# EAGLE board rev1-dragonfly_panelize (EAGLE 8.2.2)
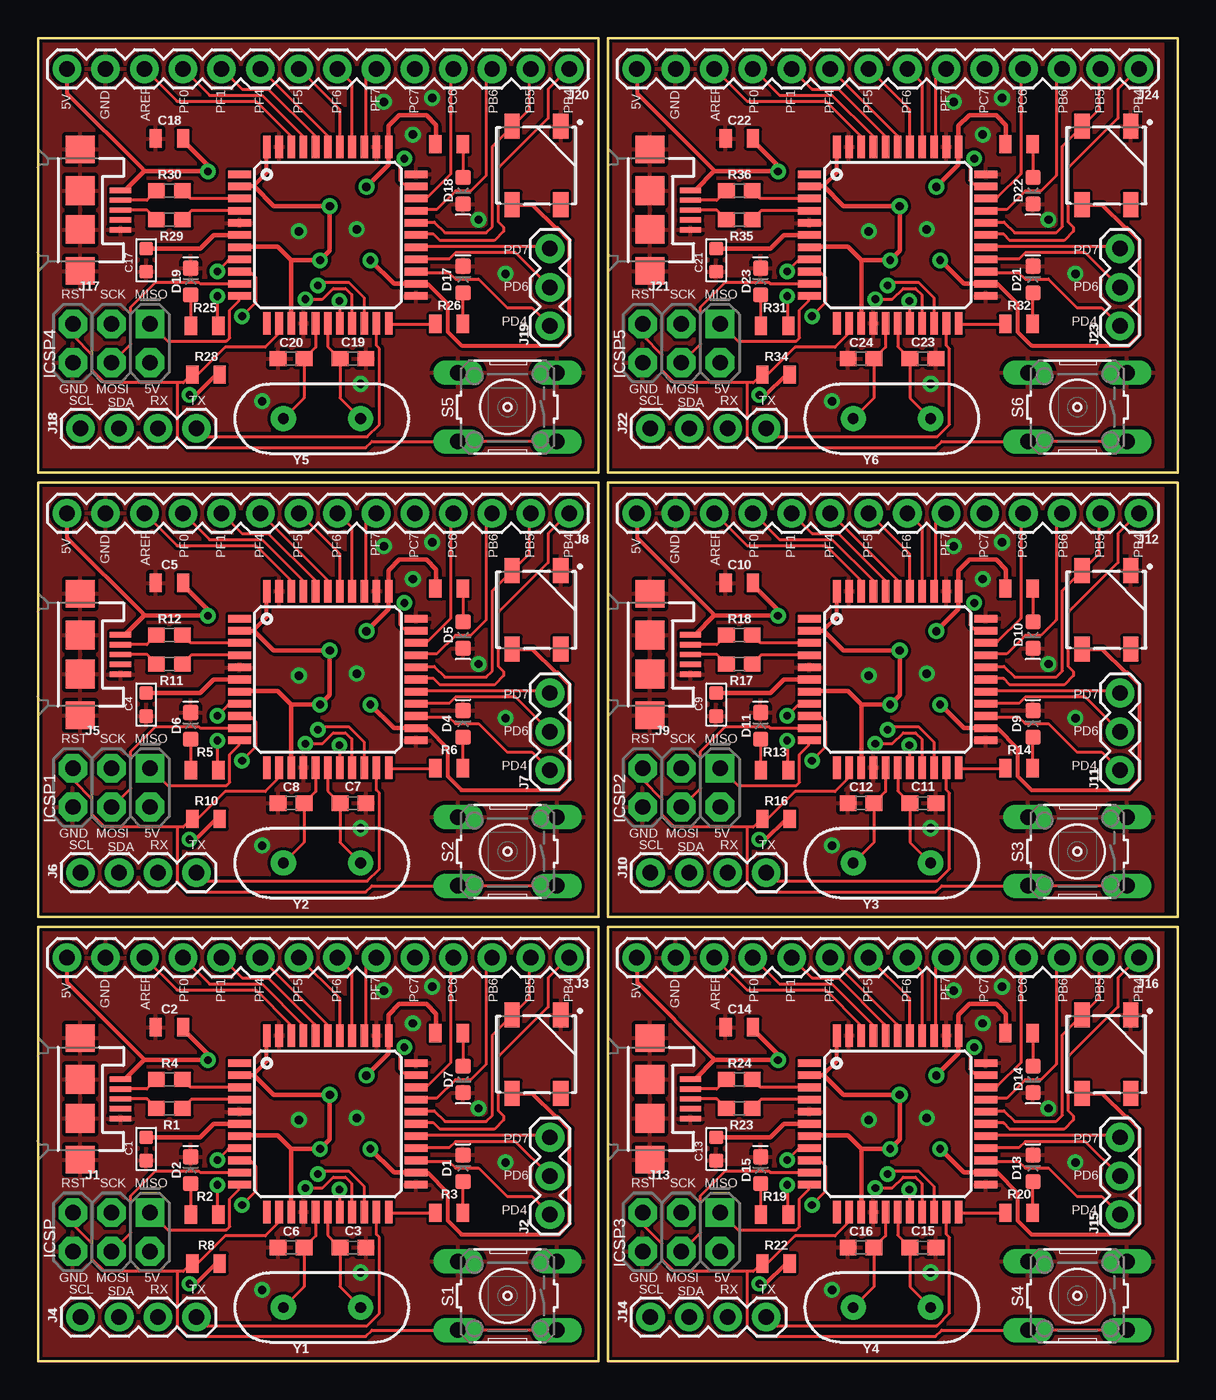
[diagram p0: board, top side]
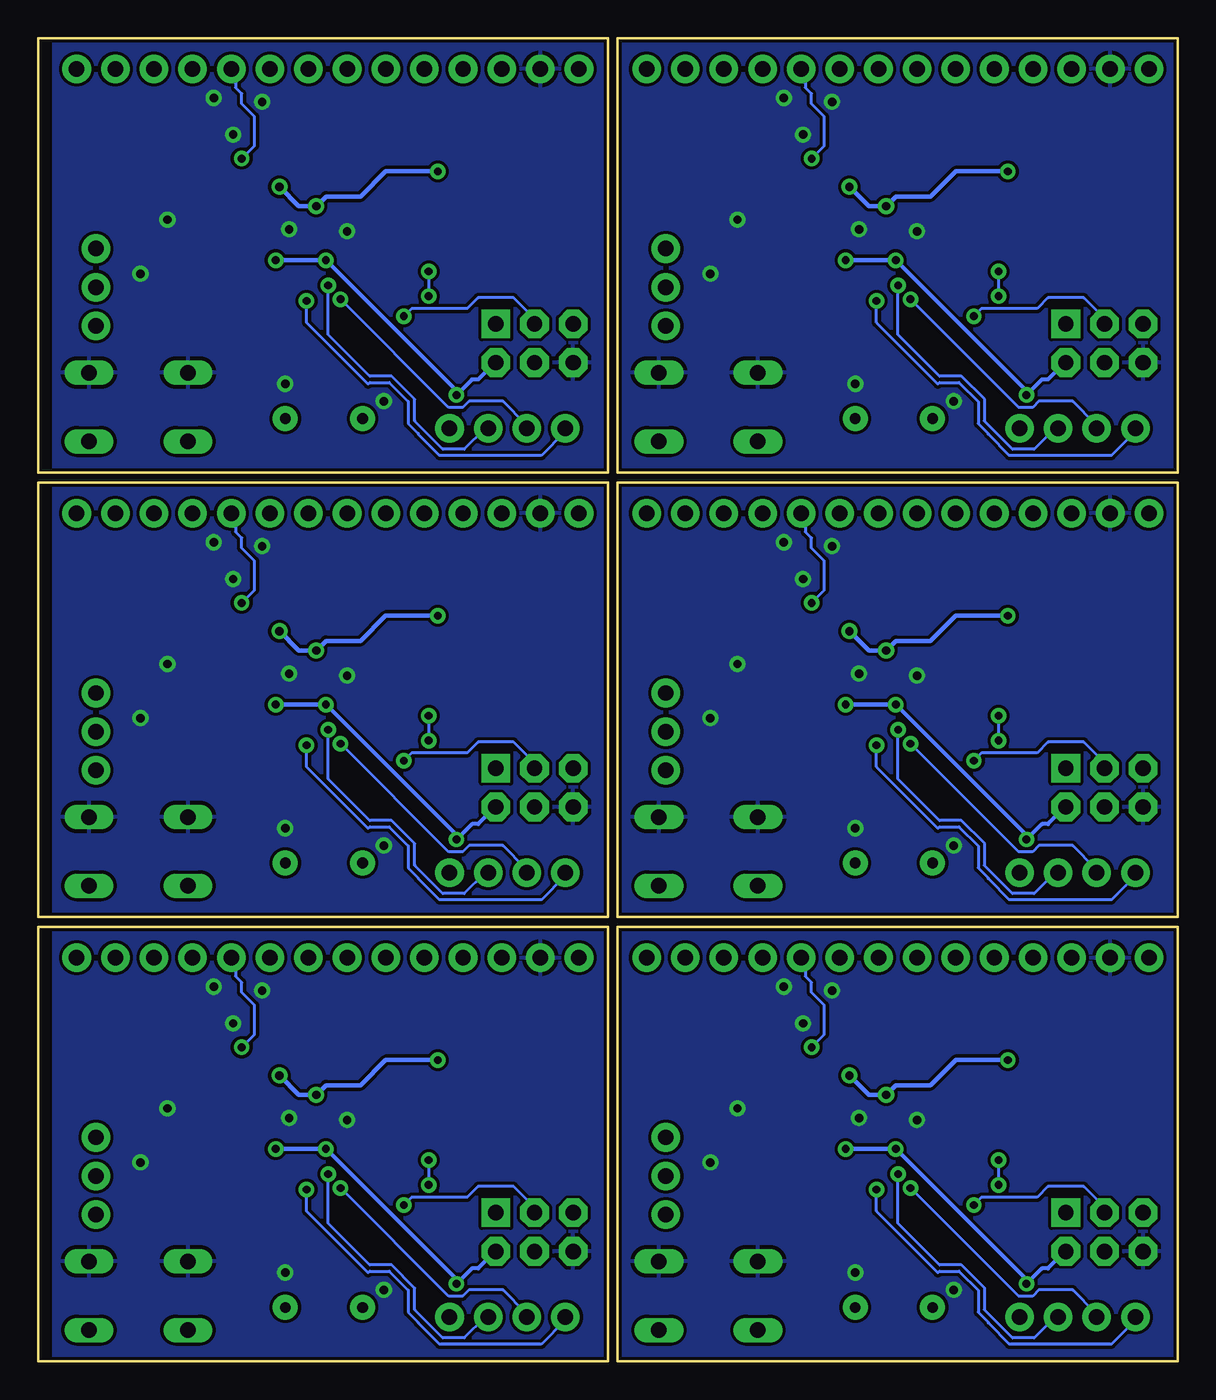
[diagram p1: board, bottom side, seen from below]

Size 74.93 x 87 mm. Coordinates in mm from the lower left corner, seen from the top.
Outline: 0,0 0,28.58 36.83,28.58 36.83,0 0,0
Outline: 0,29.21 0,57.79 36.83,57.79 36.83,29.21 0,29.21
Outline: 37.46,29.21 37.46,57.79 74.93,57.79 74.93,29.21 37.46,29.21
Outline: 37.46,0 37.46,28.58 74.93,28.58 74.93,0 37.46,0
Outline: 0,58.42 0,87 36.83,87 36.83,58.42 0,58.42
Outline: 37.46,58.42 37.46,87 74.93,87 74.93,58.42 37.46,58.42
Copper layers (1*16): Top 0.035mm / dielectric 1.5mm / Bottom 0.035mm
Design rules "SparkFun": minimum track width 8mil, minimum drill 20mil, track to track 8mil, track to pad 8mil, pad to pad 8mil, via to via 8mil, smd to smd 8mil, copper to edge 8mil, drill to drill 8mil, minimum pad ring 12mil, minimum via ring 10mil, stop-mask expansion 4mil, vias tented up to drill 20mil, thermal gap 10mil
Net classes: 1 GND: width 0.254 mm; 2 VBAT: width 0.254 mm; 3 VCC: width 0.254 mm

## Footprints (pad centres in the part's own frame; a part is rotated, then mirrored left to right if it is on the bottom)
C0603 = smd 0.889 x 0.889: 1 0,0.762; 2 0,-0.762
0805 = smd 0.8 x 1.2: 1 -0.9,0; 2 0.9,0
0603 = smd 1.1 x 1: 1 -0.85,0; 2 0.85,0
LED-0603 = smd 1 x 1: A -0.877,0; C 0.877,0
WS2812B = smd 1.651 x 1: 1 2.577,-1.6; 2 2.577,1.6; 3 -2.577,1.6; 4 -2.577,-1.6
2X3-NS = drill 1.016 pad 1.88 square: 1 -2.54,-1.27 | drill 1.016 pad 1.88 octagon: 2 -2.54,1.27; 3 0,-1.27; 4 0,1.27; 5 2.54,-1.27; 6 2.54,1.27
USB-MICROB = smd 1.4 x 0.35: D+ -2.65,0; D- -2.65,-0.65; GND -2.65,1.3; ID -2.65,0.65; VBUS -2.65,-1.3 | smd 1.9 x 1.8: MT1 0,-4; MT2 0,4 | smd 1.9 x 1.9: P$1 0,-1.27; P$2 0,1.27
1X03 = drill 1.016 pad 1.88: 1 0,0; 2 2.54,0; 3 5.08,0
1X14 = drill 1.016 pad 1.88: 1 0,0; 2 2.54,0; 3 5.08,0; 4 7.62,0; 5 10.16,0; 6 12.7,0; 7 15.24,0; 8 17.78,0; 9 20.32,0; 10 22.86,0; 11 25.4,0; 12 27.94,0; 13 30.48,0; 14 33.02,0
1X04 = drill 1.016 pad 1.88: 1 0,0; 2 2.54,0; 3 5.08,0; 4 7.62,0
B3F-10XX = drill 1.016 long: 1 -3.251,2.261; 2 3.251,2.261; 3 -3.251,-2.261; 4 3.251,-2.261
TQFP44 = smd 1.5 x 0.5: 1 -5.8,4; 2 -5.8,3.2; 3 -5.8,2.4; 4 -5.8,1.6; 5 -5.8,0.8; 6 -5.8,0; 7 -5.8,-0.8; 8 -5.8,-1.6; 9 -5.8,-2.4; 10 -5.8,-3.2; 11 -5.8,-4; 23 5.8,-4; 24 5.8,-3.2; 25 5.8,-2.4; 26 5.8,-1.6; 27 5.8,-0.8; 28 5.8,0; 29 5.8,0.8; 30 5.8,1.6; 31 5.8,2.4; 32 5.8,3.2; 33 5.8,4 | smd 0.5 x 1.5: 12 -4,-5.8; 13 -3.2,-5.8; 14 -2.4,-5.8; 15 -1.6,-5.8; 16 -0.8,-5.8; 17 0,-5.8; 18 0.8,-5.8; 19 1.6,-5.8; 20 2.4,-5.8; 21 3.2,-5.8; 22 4,-5.8; 34 4,5.8; 35 3.2,5.8; 36 2.4,5.8; 37 1.6,5.8; 38 0.8,5.8; 39 0,5.8; 40 -0.8,5.8; 41 -1.6,5.8; 42 -2.4,5.8; 43 -3.2,5.8; 44 -4,5.8
HC49US = drill 0.7 pad 1.651: 1 -2.54,0; 2 2.54,0

## Placement (x,y rotation side)
C1  1uf  [C0603]  7.11,13.97 0 top
C2  10uF  [0805]  8.64,21.97 0 top
C3  22pF  [0603]  20.7,7.49 180 top
C4  1uf  [C0603]  7.11,43.18 0 top
C5  10uF  [0805]  8.64,51.18 0 top
C6  22pF  [0603]  16.64,7.49 0 top
C7  22pF  [0603]  20.7,36.7 180 top
C8  22pF  [0603]  16.64,36.7 0 top
C9  1uf  [C0603]  44.58,43.18 0 top
C10  10uF  [0805]  46.1,51.18 0 top
C11  22pF  [0603]  58.17,36.7 180 top
C12  22pF  [0603]  54.1,36.7 0 top
C13  1uf  [C0603]  44.58,13.97 0 top
C14  10uF  [0805]  46.1,21.97 0 top
C15  22pF  [0603]  58.17,7.49 180 top
C16  22pF  [0603]  54.1,7.49 0 top
C17  1uf  [C0603]  7.11,72.39 0 top
C18  10uF  [0805]  8.64,80.39 0 top
C19  22pF  [0603]  20.7,65.91 180 top
C20  22pF  [0603]  16.64,65.91 0 top
C21  1uf  [C0603]  44.58,72.39 0 top
C22  10uF  [0805]  46.1,80.39 0 top
C23  22pF  [0603]  58.17,65.91 180 top
C24  22pF  [0603]  54.1,65.91 0 top
D1  BLUE  [LED-0603]  27.94,12.7 90 top
D2  RED  [LED-0603]  10.03,12.57 90 top
D3  WS2812B  [WS2812B]  32.77,20.19 270 top
D4  BLUE  [LED-0603]  27.94,41.91 90 top
D5  GREEN  [LED-0603]  27.94,47.75 270 top
D6  RED  [LED-0603]  10.03,41.78 90 top
D7  GREEN  [LED-0603]  27.94,18.54 270 top
D8  WS2812B  [WS2812B]  32.77,49.4 270 top
D9  BLUE  [LED-0603]  65.41,41.91 90 top
D10  GREEN  [LED-0603]  65.41,47.75 270 top
D11  RED  [LED-0603]  47.5,41.78 90 top
D12  WS2812B  [WS2812B]  70.23,49.4 270 top
D13  BLUE  [LED-0603]  65.41,12.7 90 top
D14  GREEN  [LED-0603]  65.41,18.54 270 top
D15  RED  [LED-0603]  47.5,12.57 90 top
D16  WS2812B  [WS2812B]  70.23,20.19 270 top
D17  BLUE  [LED-0603]  27.94,71.12 90 top
D18  GREEN  [LED-0603]  27.94,76.96 270 top
D19  RED  [LED-0603]  10.03,70.99 90 top
D20  WS2812B  [WS2812B]  32.77,78.61 270 top
D21  BLUE  [LED-0603]  65.41,71.12 90 top
D22  GREEN  [LED-0603]  65.41,76.96 270 top
D23  RED  [LED-0603]  47.5,70.99 90 top
D24  WS2812B  [WS2812B]  70.23,78.61 270 top
ICSP  AVR_SPI_PRG_6NS  [2X3-NS]  4.83,8.51 180 top
ICSP1  AVR_SPI_PRG_6NS  [2X3-NS]  4.83,37.72 180 top
ICSP2  AVR_SPI_PRG_6NS  [2X3-NS]  42.29,37.72 180 top
ICSP3  AVR_SPI_PRG_6NS  [2X3-NS]  42.29,8.51 180 top
ICSP4  AVR_SPI_PRG_6NS  [2X3-NS]  4.83,66.93 180 top
ICSP5  AVR_SPI_PRG_6NS  [2X3-NS]  42.29,66.93 180 top
J1  [USB-MICROB]  2.78,17.26 180 top
J2  [1X03]  33.66,9.65 90 top
J3  [1X14]  34.93,26.54 180 top
J4  [1X04]  2.79,2.92 0 top
J5  [USB-MICROB]  2.78,46.47 180 top
J6  [1X04]  2.79,32.13 0 top
J7  [1X03]  33.66,38.86 90 top
J8  [1X14]  34.93,55.75 180 top
J9  [USB-MICROB]  40.24,46.47 180 top
J10  [1X04]  40.26,32.13 0 top
J11  [1X03]  71.12,38.86 90 top
J12  [1X14]  72.39,55.75 180 top
J13  [USB-MICROB]  40.24,17.26 180 top
J14  [1X04]  40.26,2.92 0 top
J15  [1X03]  71.12,9.65 90 top
J16  [1X14]  72.39,26.54 180 top
J17  [USB-MICROB]  2.78,75.68 180 top
J18  [1X04]  2.79,61.34 0 top
J19  [1X03]  33.66,68.07 90 top
J20  [1X14]  34.93,84.96 180 top
J21  [USB-MICROB]  40.24,75.68 180 top
J22  [1X04]  40.26,61.34 0 top
J23  [1X03]  71.12,68.07 90 top
J24  [1X14]  72.39,84.96 180 top
R1  22  [0603]  8.64,16.64 0 top
R2  1k  [0805]  10.95,9.65 0 top
R3  1k  [0805]  27.02,9.78 180 top
R4  22  [0603]  8.64,18.54 0 top
R5  1k  [0805]  10.95,38.86 0 top
R6  1k  [0805]  27.02,38.99 180 top
R7  1k  [0805]  27.02,21.59 180 top
R8  1k  [0805]  11.05,6.45 0 top
R9  1k  [0805]  27.02,50.8 180 top
R10  1k  [0805]  11.05,35.66 0 top
R11  22  [0603]  8.64,45.85 0 top
R12  22  [0603]  8.64,47.75 0 top
R13  1k  [0805]  48.42,38.86 0 top
R14  1k  [0805]  64.48,38.99 180 top
R15  1k  [0805]  64.48,50.8 180 top
R16  1k  [0805]  48.51,35.66 0 top
R17  22  [0603]  46.1,45.85 0 top
R18  22  [0603]  46.1,47.75 0 top
R19  1k  [0805]  48.42,9.65 0 top
R20  1k  [0805]  64.48,9.78 180 top
R21  1k  [0805]  64.48,21.59 180 top
R22  1k  [0805]  48.51,6.45 0 top
R23  22  [0603]  46.1,16.64 0 top
R24  22  [0603]  46.1,18.54 0 top
R25  1k  [0805]  10.95,68.07 0 top
R26  1k  [0805]  27.02,68.2 180 top
R27  1k  [0805]  27.02,80.01 180 top
R28  1k  [0805]  11.05,64.87 0 top
R29  22  [0603]  8.64,75.06 0 top
R30  22  [0603]  8.64,76.96 0 top
R31  1k  [0805]  48.42,68.07 0 top
R32  1k  [0805]  64.48,68.2 180 top
R33  1k  [0805]  64.48,80.01 180 top
R34  1k  [0805]  48.51,64.87 0 top
R35  22  [0603]  46.1,75.06 0 top
R36  22  [0603]  46.1,76.96 0 top
S1  [B3F-10XX]  30.86,4.32 180 top
S2  [B3F-10XX]  30.86,33.53 180 top
S3  [B3F-10XX]  68.33,33.53 180 top
S4  [B3F-10XX]  68.33,4.32 180 top
S5  [B3F-10XX]  30.86,62.74 180 top
S6  [B3F-10XX]  68.33,62.74 180 top
U$1  32U4  [TQFP44]  19.05,15.62 0 top
U$2  32U4  [TQFP44]  19.05,44.83 0 top
U$3  32U4  [TQFP44]  56.52,44.83 0 top
U$4  32U4  [TQFP44]  56.52,15.62 0 top
U$5  32U4  [TQFP44]  19.05,74.04 0 top
U$6  32U4  [TQFP44]  56.52,74.04 0 top
Y1  16MHz  [HC49US]  18.67,3.56 180 top
Y2  16MHz  [HC49US]  18.67,32.77 180 top
Y3  16MHz  [HC49US]  56.13,32.77 180 top
Y4  16MHz  [HC49US]  56.13,3.56 180 top
Y5  16MHz  [HC49US]  18.67,61.98 180 top
Y6  16MHz  [HC49US]  56.13,61.98 180 top

## Library data of the parts
C1 C4 C9 C13 C17 C21 = Seeed-Capacitor; MPN: CC0603KRX7R8BB105
C2 C5 C10 C14 C18 C22 = SparkFun-Capacitors; PROD_ID: CAP-11330
C3 C6-C8 C11 C12 C15 C16 C19 C20 C23 C24 = SparkFun-Capacitors; PROD_ID: CAP-07876
D1 D4 D9 D13 D17 D21 = SparkFun-LED; PROD_ID: DIO-08575
D2 D6 D11 D15 D19 D23 = SparkFun-LED; PROD_ID: DIO-00819
D3 D8 D12 D16 D20 D24 = SparkFun-LED; PROD_ID: DIO-12503
D5 D7 D10 D14 D18 D22 = SparkFun-LED; PROD_ID: DIO-00821
ICSP ICSP1-ICSP5 J2 J3 J7 J8 J11 J12 J15 J16 J19 J20 J23 J24 = SparkFun-Connectors
J1 J5 J9 J13 J17 J21 = SparkFun-Connectors; PROD_ID: CONN-09505; SF_ID: PRT-08533
J4 J6 J10 J14 J18 J22 = SparkFun-Connectors; PROD_ID: CONN-09696
R1 R4 R11 R12 R17 R18 R23 R24 R29 R30 R35 R36 = SparkFun-Resistors; PROD_ID: RES-08698
R2 R3 R5-R10 R13-R16 R19-R22 R25-R28 R31-R34 = SparkFun-Resistors
S1-S6 = switch-omron; MPN: B3F-1000; OC_FARNELL: 176432; OC_NEWARK: 36M3542
U$1-U$6 = SparkFun-IC-Microcontroller; PROD_ID: IC-11161
Y1-Y6 = SparkFun-Clocks; PROD_ID: XTAL-08181; SF_ID: COM-00536

## Nets
5V [VCC]: C2.2 D3.1 ICSP.2 J1.VBUS J3.14 R7.2 R8.2 U$1.2 U$1.7 U$1.14 U$1.24 U$1.34 U$1.44
5V1 [VCC]: C5.2 D8.1 ICSP1.2 J5.VBUS J8.14 R9.2 R10.2 U$2.2 U$2.7 U$2.14 U$2.24 U$2.34 U$2.44
5V2 [VCC]: C10.2 D12.1 ICSP2.2 J9.VBUS J12.14 R15.2 R16.2 U$3.2 U$3.7 U$3.14 U$3.24 U$3.34 U$3.44
5V3 [VCC]: C14.2 D16.1 ICSP3.2 J13.VBUS J16.14 R21.2 R22.2 U$4.2 U$4.7 U$4.14 U$4.24 U$4.34 U$4.44
5V4 [VCC]: C18.2 D20.1 ICSP4.2 J17.VBUS J20.14 R27.2 R28.2 U$5.2 U$5.7 U$5.14 U$5.24 U$5.34 U$5.44
5V5 [VCC]: C22.2 D24.1 ICSP5.2 J21.VBUS J24.14 R33.2 R34.2 U$6.2 U$6.7 U$6.14 U$6.24 U$6.34 U$6.44
AREF: J3.12 U$1.42
AREF1: J8.12 U$2.42
AREF2: J12.12 U$3.42
AREF3: J16.12 U$4.42
AREF4: J20.12 U$5.42
AREF5: J24.12 U$6.42
GND [GND]: C1.2 C2.1 C3.1 C6.1 D1.C D2.C D3.3 D7.C ICSP.6 J1.GND J1.MT1 J1.MT2 J1.P$1 J1.P$2 J3.13 S1.3 S1.4 U$1.5 U$1.15 U$1.23 U$1.33 U$1.35 U$1.43
GND1 [GND]: C4.2 C5.1 C7.1 C8.1 D4.C D5.C D6.C D8.3 ICSP1.6 J5.GND J5.MT1 J5.MT2 J5.P$1 J5.P$2 J8.13 S2.3 S2.4 U$2.5 U$2.15 U$2.23 U$2.33 U$2.35 U$2.43
GND2 [GND]: C9.2 C10.1 C11.1 C12.1 D9.C D10.C D11.C D12.3 ICSP2.6 J9.GND J9.MT1 J9.MT2 J9.P$1 J9.P$2 J12.13 S3.3 S3.4 U$3.5 U$3.15 U$3.23 U$3.33 U$3.35 U$3.43
GND3 [GND]: C13.2 C14.1 C15.1 C16.1 D13.C D14.C D15.C D16.3 ICSP3.6 J13.GND J13.MT1 J13.MT2 J13.P$1 J13.P$2 J16.13 S4.3 S4.4 U$4.5 U$4.15 U$4.23 U$4.33 U$4.35 U$4.43
GND4 [GND]: C17.2 C18.1 C19.1 C20.1 D17.C D18.C D19.C D20.3 ICSP4.6 J17.GND J17.MT1 J17.MT2 J17.P$1 J17.P$2 J20.13 S5.3 S5.4 U$5.5 U$5.15 U$5.23 U$5.33 U$5.35 U$5.43
GND5 [GND]: C21.2 C22.1 C23.1 C24.1 D21.C D22.C D23.C D24.3 ICSP5.6 J21.GND J21.MT1 J21.MT2 J21.P$1 J21.P$2 J24.13 S6.3 S6.4 U$6.5 U$6.15 U$6.23 U$6.33 U$6.35 U$6.43
MISO: ICSP.1 U$1.11
MISO1: ICSP1.1 U$2.11
MISO2: ICSP2.1 U$3.11
MISO3: ICSP3.1 U$4.11
MISO4: ICSP4.1 U$5.11
MISO5: ICSP5.1 U$6.11
MOSI: ICSP.4 U$1.10
MOSI1: ICSP1.4 U$2.10
MOSI2: ICSP2.4 U$3.10
MOSI3: ICSP3.4 U$4.10
MOSI4: ICSP4.4 U$5.10
MOSI5: ICSP5.4 U$6.10
N$1: D1.A R3.1
N$2: D2.A R2.1
N$3: D7.A R7.1
N$4: D5.A R9.1
N$5: D4.A R6.1
N$6: D6.A R5.1
N$7: D10.A R15.1
N$8: D9.A R14.1
N$9: D11.A R13.1
N$10: D14.A R21.1
N$11: D13.A R20.1
N$12: D15.A R19.1
N$13: D18.A R27.1
N$14: D17.A R26.1
N$15: D19.A R25.1
N$16: D22.A R33.1
N$17: D21.A R32.1
N$18: D23.A R31.1
PB1: D8.4 J8.2 U$2.29
PB2: J8.1 U$2.28
PB3: J8.3 U$2.30
PB4: J3.1 U$1.28
PB5: D3.4 J3.2 U$1.29
PB6: J3.3 U$1.30
PB7: U$1.12
PB8: U$2.12
PB9: D12.4 J12.2 U$3.29
PB10: J12.1 U$3.28
PB11: J12.3 U$3.30
PB12: U$3.12
PB13: D16.4 J16.2 U$4.29
PB14: J16.1 U$4.28
PB15: J16.3 U$4.30
PB16: U$4.12
PB17: D20.4 J20.2 U$5.29
PB18: J20.1 U$5.28
PB19: J20.3 U$5.30
PB20: U$5.12
PB21: D24.4 J24.2 U$6.29
PB22: J24.1 U$6.28
PB23: J24.3 U$6.30
PB24: U$6.12
PC1: J8.5 U$2.32
PC2: J8.4 U$2.31
PC3: J12.5 U$3.32
PC4: J12.4 U$3.31
PC5: J16.5 U$4.32
PC6: J3.4 U$1.31
PC7: J3.5 U$1.32
PC8: J16.4 U$4.31
PC9: J20.5 U$5.32
PC10: J20.4 U$5.31
PC11: J24.5 U$6.32
PC12: J24.4 U$6.31
PD0: J4.1 U$1.18
PD1: J4.2 U$1.19
PD2: J7.1 U$2.25
PD3: J7.2 U$2.26
PD4: J2.1 U$1.25
PD5: J7.3 U$2.27
PD6: J2.2 U$1.26
PD7: J2.3 U$1.27
PD8: J6.2 U$2.19
PD9: J6.1 U$2.18
PD10: J11.1 U$3.25
PD11: J11.2 U$3.26
PD12: J11.3 U$3.27
PD13: J10.2 U$3.19
PD14: J10.1 U$3.18
PD15: J15.1 U$4.25
PD16: J15.2 U$4.26
PD17: J15.3 U$4.27
PD18: J14.2 U$4.19
PD19: J14.1 U$4.18
PD20: J19.1 U$5.25
PD21: J19.2 U$5.26
PD22: J19.3 U$5.27
PD23: J18.2 U$5.19
PD24: J18.1 U$5.18
PD25: J23.1 U$6.25
PD26: J23.2 U$6.26
PD27: J23.3 U$6.27
PD28: J22.2 U$6.19
PD29: J22.1 U$6.18
PE1: U$2.1
PE2: U$3.1
PE3: U$4.1
PE4: U$5.1
PE5: U$6.1
PE6: U$1.1
PF0: J3.11 U$1.41
PF1: J3.10 U$1.40
PF2: J8.6 U$2.36
PF3: J8.7 U$2.37
PF4: J3.9 U$1.39
PF5: J3.8 U$1.38
PF6: J3.7 U$1.37
PF7: J3.6 U$1.36
PF8: J8.8 U$2.38
PF9: J8.9 U$2.39
PF10: J8.10 U$2.40
PF11: J8.11 U$2.41
PF12: J12.6 U$3.36
PF13: J12.7 U$3.37
PF14: J12.8 U$3.38
PF15: J12.9 U$3.39
PF16: J12.10 U$3.40
PF17: J12.11 U$3.41
PF18: J16.6 U$4.36
PF19: J16.7 U$4.37
PF20: J16.8 U$4.38
PF21: J16.9 U$4.39
PF22: J16.10 U$4.40
PF23: J16.11 U$4.41
PF24: J20.6 U$5.36
PF25: J20.7 U$5.37
PF26: J20.8 U$5.38
PF27: J20.9 U$5.39
PF28: J20.10 U$5.40
PF29: J20.11 U$5.41
PF30: J24.6 U$6.36
PF31: J24.7 U$6.37
PF32: J24.8 U$6.38
PF33: J24.9 U$6.39
PF34: J24.10 U$6.40
PF35: J24.11 U$6.41
RST: ICSP.5 R8.1 S1.1 S1.2 U$1.13
RST1: ICSP1.5 R10.1 S2.1 S2.2 U$2.13
RST2: ICSP2.5 R16.1 S3.1 S3.2 U$3.13
RST3: ICSP3.5 R22.1 S4.1 S4.2 U$4.13
RST4: ICSP4.5 R28.1 S5.1 S5.2 U$5.13
RST5: ICSP5.5 R34.1 S6.1 S6.2 U$6.13
RX: J4.3 U$1.20
RX1: J6.3 U$2.20
RX2: J10.3 U$3.20
RX3: J14.3 U$4.20
RX4: J18.3 U$5.20
RX5: J22.3 U$6.20
RX_LED: R2.2 U$1.8
RX_LED1: R5.2 U$2.8
RX_LED2: R13.2 U$3.8
RX_LED3: R19.2 U$4.8
RX_LED4: R25.2 U$5.8
RX_LED5: R31.2 U$6.8
SCK: ICSP.3 U$1.9
SCK1: ICSP1.3 U$2.9
SCK2: ICSP2.3 U$3.9
SCK3: ICSP3.3 U$4.9
SCK4: ICSP4.3 U$5.9
SCK5: ICSP5.3 U$6.9
TX: J4.4 U$1.21
TX1: J6.4 U$2.21
TX2: J10.4 U$3.21
TX3: J14.4 U$4.21
TX4: J18.4 U$5.21
TX5: J22.4 U$6.21
TX_LED: R3.2 U$1.22
TX_LED1: R6.2 U$2.22
TX_LED2: R14.2 U$3.22
TX_LED3: R20.2 U$4.22
TX_LED4: R26.2 U$5.22
TX_LED5: R32.2 U$6.22
UCAP: C1.1 U$1.6
UCAP1: C4.1 U$2.6
UCAP2: C9.1 U$3.6
UCAP3: C13.1 U$4.6
UCAP4: C17.1 U$5.6
UCAP5: C21.1 U$6.6
USBD1_N: R4.2 U$1.3
USBD1_N1: R12.2 U$2.3
USBD1_N2: R18.2 U$3.3
USBD1_N3: R24.2 U$4.3
USBD1_N4: R30.2 U$5.3
USBD1_N5: R36.2 U$6.3
USBD1_P: R1.2 U$1.4
USBD1_P1: R11.2 U$2.4
USBD1_P2: R17.2 U$3.4
USBD1_P3: R23.2 U$4.4
USBD1_P4: R29.2 U$5.4
USBD1_P5: R35.2 U$6.4
USBD_N: J1.D- R4.1
USBD_N1: J5.D- R12.1
USBD_N2: J9.D- R18.1
USBD_N3: J13.D- R24.1
USBD_N4: J17.D- R30.1
USBD_N5: J21.D- R36.1
USBD_P: J1.D+ R1.1
USBD_P1: J5.D+ R11.1
USBD_P2: J9.D+ R17.1
USBD_P3: J13.D+ R23.1
USBD_P4: J17.D+ R29.1
USBD_P5: J21.D+ R35.1
XTAL_N: C6.2 U$1.16 Y1.2
XTAL_N1: C8.2 U$2.16 Y2.2
XTAL_N2: C12.2 U$3.16 Y3.2
XTAL_N3: C16.2 U$4.16 Y4.2
XTAL_N4: C20.2 U$5.16 Y5.2
XTAL_N5: C24.2 U$6.16 Y6.2
XTAL_P: C3.2 U$1.17 Y1.1
XTAL_P1: C7.2 U$2.17 Y2.1
XTAL_P2: C11.2 U$3.17 Y3.1
XTAL_P3: C15.2 U$4.17 Y4.1
XTAL_P4: C19.2 U$5.17 Y5.1
XTAL_P5: C23.2 U$6.17 Y6.1

## Tracks (layer width: path | path; a pad name or v marks a point on that pad's centre or on a via)
5V  (via drill 0.51, 0.55)
  Top 0.254: v9.96,5.11 10.36,5.11 11.68,6.43 11.89,6.43 R8.2 | C2.2 9.54,21.83 | 13.31,14.86 U$1.7 | U$1.44 15.04,21.36 15.04,19.74 14.22,18.92 14.2,18.82 | D3.1 31.19,17.6 32.51,17.6 34.04,16.08 34.14,16.08 34.95,15.27 34.95,9.07 34.24,8.36 27.84,8.36 26.92,9.27 26.92,11.1 25.6,12.42 24.99,12.42 U$1.24 | J3.14 1.93,26.54 1.93,24.92 6.91,19.94 6.98,19.81
  Top 0.305: J1.VBUS 5.74,18.57 6.98,19.81 v11.18,19.81 11.18,20.19 9.54,21.83 | 16.65,13.97 U$1.14 | 24.82,12.45 U$1.24 23.39,12.42 v21.84,13.97 | v18.54,13.97 | 16.65,13.97 v18.54,13.97 | U$1.2 14.2,18.82 15.49,17.53 v19.18,17.53 19.18,14.61 v18.54,13.97 | 16.65,13.97 15.76,14.86 13.31,14.86 13.29,14.86 | v21.59,18.8 23.05,20.26 U$1.34 23.05,22.8 23.75,23.5 25.53,23.5 26.16,22.86 26.16,21.63 R7.2
  Bottom 0.254: ICSP.2 7.42,7.24 8.53,6.12 8.94,6.12 v9.96,5.11 9.85,5.31 18.49,13.94 v18.54,13.97
  Bottom 0.305: v11.18,19.81 14.6,19.81 16.26,18.16 18.54,18.16 v19.18,17.53 20.32,17.53 v21.59,18.8 | v18.54,13.97 v21.84,13.97
5V1  (via drill 0.51, 0.55)
  Top 0.254: v9.96,34.32 10.36,34.32 11.68,35.64 11.89,35.64 R10.2 | C5.2 9.54,51.04 | 13.31,44.07 U$2.7 | U$2.44 15.04,50.57 15.04,48.95 14.22,48.13 14.2,48.03 | D8.1 31.19,46.81 32.51,46.81 34.04,45.29 34.14,45.29 34.95,44.48 34.95,38.28 34.24,37.57 27.84,37.57 26.92,38.48 26.92,40.31 25.6,41.63 24.99,41.63 U$2.24 | J8.14 1.93,55.75 1.93,54.13 6.91,49.15 6.98,49.02
  Top 0.305: J5.VBUS 5.74,47.78 6.98,49.02 v11.18,49.02 11.18,49.4 9.54,51.04 | 16.65,43.18 U$2.14 | 24.82,41.66 U$2.24 23.39,41.63 v21.84,43.18 | v18.54,43.18 | 16.65,43.18 v18.54,43.18 | U$2.2 14.2,48.03 15.49,46.74 v19.18,46.74 19.18,43.82 v18.54,43.18 | 16.65,43.18 15.76,44.07 13.31,44.07 13.29,44.07 | v21.59,48.01 23.05,49.47 U$2.34 23.05,52.01 23.75,52.71 25.53,52.71 26.16,52.07 26.16,50.84 R9.2
  Bottom 0.254: ICSP1.2 7.42,36.45 8.53,35.33 8.94,35.33 v9.96,34.32 9.85,34.52 18.49,43.15 v18.54,43.18
  Bottom 0.305: v11.18,49.02 14.6,49.02 16.26,47.37 18.54,47.37 v19.18,46.74 20.32,46.74 v21.59,48.01 | v18.54,43.18 v21.84,43.18
5V2  (via drill 0.51, 0.55)
  Top 0.254: v47.42,34.32 47.83,34.32 49.15,35.64 49.35,35.64 R16.2 | C10.2 47.02,51.18 47,51.04 | 50.77,44.07 U$3.7 | U$3.44 52.5,50.57 52.5,48.95 51.69,48.13 51.66,48.03 | D12.1 68.66,46.81 69.98,46.81 71.5,45.29 71.6,45.29 72.42,44.48 72.42,38.28 71.7,37.57 65.3,37.57 64.39,38.48 64.39,40.31 63.07,41.63 62.46,41.63 U$3.24 | J12.14 39.4,55.75 39.4,54.13 44.37,49.15 44.45,49.02
  Top 0.305: J9.VBUS 43.21,47.78 44.45,49.02 v48.64,49.02 48.64,49.4 47,51.04 | 54.11,43.18 U$3.14 | 62.29,41.66 U$3.24 60.86,41.63 v59.31,43.18 | v56.01,43.18 | 54.11,43.18 v56.01,43.18 | U$3.2 51.66,48.03 52.96,46.74 v56.64,46.74 56.64,43.82 v56.01,43.18 | 54.11,43.18 53.23,44.07 50.77,44.07 50.75,44.07 | v59.05,48.01 60.51,49.47 U$3.34 60.51,52.01 61.21,52.71 62.99,52.71 63.63,52.07 63.63,50.84 R15.2
  Bottom 0.254: ICSP2.2 44.88,36.45 46,35.33 46.41,35.33 v47.42,34.32 47.32,34.52 55.96,43.15 v56.01,43.18
  Bottom 0.305: v48.64,49.02 52.07,49.02 53.72,47.37 56.01,47.37 v56.64,46.74 57.78,46.74 v59.05,48.01 | v56.01,43.18 v59.31,43.18
5V3  (via drill 0.51, 0.55)
  Top 0.254: v47.42,5.11 47.83,5.11 49.15,6.43 49.35,6.43 R22.2 | C14.2 47.02,21.97 47,21.83 | 50.77,14.86 U$4.7 | U$4.44 52.5,21.36 52.5,19.74 51.69,18.92 51.66,18.82 | D16.1 68.66,17.6 69.98,17.6 71.5,16.08 71.6,16.08 72.42,15.27 72.42,9.07 71.7,8.36 65.3,8.36 64.39,9.27 64.39,11.1 63.07,12.42 62.46,12.42 U$4.24 | J16.14 39.4,26.54 39.4,24.92 44.37,19.94 44.45,19.81
  Top 0.305: J13.VBUS 43.21,18.57 44.45,19.81 v48.64,19.81 48.64,20.19 47,21.83 | 54.11,13.97 U$4.14 | 62.29,12.45 U$4.24 60.86,12.42 v59.31,13.97 | v56.01,13.97 | 54.11,13.97 v56.01,13.97 | U$4.2 51.66,18.82 52.96,17.53 v56.64,17.53 56.64,14.61 v56.01,13.97 | 54.11,13.97 53.23,14.86 50.77,14.86 50.75,14.86 | v59.05,18.8 60.51,20.26 U$4.34 60.51,22.8 61.21,23.5 62.99,23.5 63.63,22.86 63.63,21.63 R21.2
  Bottom 0.254: ICSP3.2 44.88,7.24 46,6.12 46.41,6.12 v47.42,5.11 47.32,5.31 55.96,13.94 v56.01,13.97
  Bottom 0.305: v48.64,19.81 52.07,19.81 53.72,18.16 56.01,18.16 v56.64,17.53 57.78,17.53 v59.05,18.8 | v56.01,13.97 v59.31,13.97
5V4  (via drill 0.51, 0.55)
  Top 0.254: v9.96,63.53 10.36,63.53 11.68,64.85 11.89,64.85 R28.2 | C18.2 9.54,80.25 | 13.31,73.28 U$5.7 | U$5.44 15.04,79.78 15.04,78.16 14.22,77.34 14.2,77.24 | D20.1 31.19,76.02 32.51,76.02 34.04,74.5 34.14,74.5 34.95,73.69 34.95,67.49 34.24,66.78 27.84,66.78 26.92,67.69 26.92,69.52 25.6,70.84 24.99,70.84 U$5.24 | J20.14 1.93,84.96 1.93,83.34 6.91,78.36 6.98,78.23
  Top 0.305: J17.VBUS 5.74,76.99 6.98,78.23 v11.18,78.23 11.18,78.61 9.54,80.25 | 16.65,72.39 U$5.14 | 24.82,70.87 U$5.24 23.39,70.84 v21.84,72.39 | v18.54,72.39 | 16.65,72.39 v18.54,72.39 | U$5.2 14.2,77.24 15.49,75.95 v19.18,75.95 19.18,73.03 v18.54,72.39 | 16.65,72.39 15.76,73.28 13.31,73.28 13.29,73.28 | v21.59,77.22 23.05,78.68 U$5.34 23.05,81.22 23.75,81.92 25.53,81.92 26.16,81.28 26.16,80.05 R27.2
  Bottom 0.254: ICSP4.2 7.42,65.66 8.53,64.54 8.94,64.54 v9.96,63.53 9.85,63.73 18.49,72.36 v18.54,72.39
  Bottom 0.305: v11.18,78.23 14.6,78.23 16.26,76.58 18.54,76.58 v19.18,75.95 20.32,75.95 v21.59,77.22 | v18.54,72.39 v21.84,72.39
5V5  (via drill 0.51, 0.55)
  Top 0.254: v47.42,63.53 47.83,63.53 49.15,64.85 49.35,64.85 R34.2 | C22.2 47.02,80.39 47,80.25 | 50.77,73.28 U$6.7 | U$6.44 52.5,79.78 52.5,78.16 51.69,77.34 51.66,77.24 | D24.1 68.66,76.02 69.98,76.02 71.5,74.5 71.6,74.5 72.42,73.69 72.42,67.49 71.7,66.78 65.3,66.78 64.39,67.69 64.39,69.52 63.07,70.84 62.46,70.84 U$6.24 | J24.14 39.4,84.96 39.4,83.34 44.37,78.36 44.45,78.23
  Top 0.305: J21.VBUS 43.21,76.99 44.45,78.23 v48.64,78.23 48.64,78.61 47,80.25 | 54.11,72.39 U$6.14 | 62.29,70.87 U$6.24 60.86,70.84 v59.31,72.39 | v56.01,72.39 | 54.11,72.39 v56.01,72.39 | U$6.2 51.66,77.24 52.96,75.95 v56.64,75.95 56.64,73.03 v56.01,72.39 | 54.11,72.39 53.23,73.28 50.77,73.28 50.75,73.28 | v59.05,77.22 60.51,78.68 U$6.34 60.51,81.22 61.21,81.92 62.99,81.92 63.63,81.28 63.63,80.05 R33.2
  Bottom 0.254: ICSP5.2 44.88,65.66 46,64.54 46.41,64.54 v47.42,63.53 47.32,63.73 55.96,72.36 v56.01,72.39
  Bottom 0.305: v48.64,78.23 52.07,78.23 53.72,76.58 56.01,76.58 v56.64,75.95 57.78,75.95 v59.05,77.22 | v56.01,72.39 v59.31,72.39
AREF
  Top 0.203: U$1.42 16.56,21.46 16.56,22.17 14.33,24.41 9.14,24.41 7.01,26.54 J3.12
AREF1
  Top 0.203: U$2.42 16.56,50.67 16.56,51.38 14.33,53.62 9.14,53.62 7.01,55.75 J8.12
AREF2
  Top 0.203: U$3.42 54.03,50.67 54.03,51.38 51.79,53.62 46.61,53.62 44.48,55.75 J12.12
AREF3
  Top 0.203: U$4.42 54.03,21.46 54.03,22.17 51.79,24.41 46.61,24.41 44.48,26.54 J16.12
AREF4
  Top 0.203: U$5.42 16.56,79.88 16.56,80.59 14.33,82.83 9.14,82.83 7.01,84.96 J20.12
AREF5
  Top 0.203: U$6.42 54.03,79.88 54.03,80.59 51.79,82.83 46.61,82.83 44.48,84.96 J24.12
GND  (via drill 0.55)
  other vias: 21.21,5.84 14.73,4.7 20.96,16 17.15,15.88 30.73,13.08 22.73,24.38 28.96,16.64 24.64,22.22 25.91,24.64
  pour Top: 36.45,0.38 0.38,0.38 0.38,28.19 36.45,28.19
  pour Bottom: 0.38,28.19 36.45,28.19 36.45,0.38 0.38,0.38
GND1  (via drill 0.55)
  other vias: 21.21,35.05 14.73,33.91 20.96,45.21 17.15,45.09 30.73,42.29 22.73,53.59 28.96,45.85 24.64,51.43 25.91,53.85
  pour Top: 36.45,29.59 0.38,29.59 0.38,57.4 36.45,57.4
  pour Bottom: 0.38,57.4 36.45,57.4 36.45,29.59 0.38,29.59
GND2  (via drill 0.55)
  other vias: 58.67,35.05 52.2,33.91 58.42,45.21 54.61,45.09 68.2,42.29 60.2,53.59 66.42,45.85 62.1,51.43 63.37,53.85
  pour Top: 73.91,29.59 37.85,29.59 37.85,57.4 73.91,57.4
  pour Bottom: 37.85,57.4 73.91,57.4 73.91,29.59 37.85,29.59
GND3  (via drill 0.55)
  other vias: 58.67,5.84 52.2,4.7 58.42,16 54.61,15.88 68.2,13.08 60.2,24.38 66.42,16.64 62.1,22.22 63.37,24.64
  pour Top: 73.91,0.38 37.85,0.38 37.85,28.19 73.91,28.19
  pour Bottom: 37.85,28.19 73.91,28.19 73.91,0.38 37.85,0.38
GND4  (via drill 0.55)
  other vias: 21.21,64.26 14.73,63.12 20.96,74.42 17.15,74.3 30.73,71.5 22.73,82.8 28.96,75.06 24.64,80.65 25.91,83.06
  pour Top: 36.45,58.8 0.38,58.8 0.38,86.61 36.45,86.61
  pour Bottom: 0.38,86.61 36.45,86.61 36.45,58.8 0.38,58.8
GND5  (via drill 0.55)
  other vias: 58.67,64.26 52.2,63.12 58.42,74.42 54.61,74.3 68.2,71.5 60.2,82.8 66.42,75.06 62.1,80.65 63.37,83.06
  pour Top: 73.91,58.8 37.85,58.8 37.85,86.61 73.91,86.61
  pour Bottom: 37.85,86.61 73.91,86.61 73.91,58.8 37.85,58.8
MISO
  Top 0.203: U$1.11 13.21,11.61 13.21,11.3 12.6,10.69 12.6,8.86 12.39,8.66 8.53,8.66 7.42,9.78 ICSP.1
MISO1
  Top 0.203: U$2.11 13.21,40.82 13.21,40.51 12.6,39.9 12.6,38.07 12.39,37.87 8.53,37.87 7.42,38.99 ICSP1.1
MISO2
  Top 0.203: U$3.11 50.67,40.82 50.67,40.51 50.06,39.9 50.06,38.07 49.86,37.87 46,37.87 44.88,38.99 ICSP2.1
MISO3
  Top 0.203: U$4.11 50.67,11.61 50.67,11.3 50.06,10.69 50.06,8.86 49.86,8.66 46,8.66 44.88,9.78 ICSP3.1
MISO4
  Top 0.203: U$5.11 13.21,70.03 13.21,69.72 12.6,69.11 12.6,67.28 12.39,67.08 8.53,67.08 7.42,68.2 ICSP4.1
MISO5
  Top 0.203: U$6.11 50.67,70.03 50.67,69.72 50.06,69.11 50.06,67.28 49.86,67.08 46,67.08 44.88,68.2 ICSP5.1
MOSI
  Top 0.203: U$1.10 13.21,12.42 10.67,12.42 10.57,12.52 7.72,12.52 6.1,10.9 6.1,8.46 4.88,7.24 ICSP.4
MOSI1
  Top 0.203: U$2.10 13.21,41.63 10.67,41.63 10.57,41.73 7.72,41.73 6.1,40.11 6.1,37.67 4.88,36.45 ICSP1.4
MOSI2
  Top 0.203: U$3.10 50.67,41.63 48.13,41.63 48.03,41.73 45.19,41.73 43.56,40.11 43.56,37.67 42.34,36.45 ICSP2.4
MOSI3
  Top 0.203: U$4.10 50.67,12.42 48.13,12.42 48.03,12.52 45.19,12.52 43.56,10.9 43.56,8.46 42.34,7.24 ICSP3.4
MOSI4
  Top 0.203: U$5.10 13.21,70.84 10.67,70.84 10.57,70.94 7.72,70.94 6.1,69.32 6.1,66.88 4.88,65.66 ICSP4.4
MOSI5
  Top 0.203: U$6.10 50.67,70.84 48.13,70.84 48.03,70.94 45.19,70.94 43.56,69.32 43.56,66.88 42.34,65.66 ICSP5.4
N$1
  Top 0.203: D1.A 27.94,9.78 R3.1
N$2
  Top 0.203: D2.A 10.06,11.61 10.06,9.68 R2.1
N$3
  Top 0.203: D7.A 27.94,21.56 R7.1
N$4
  Top 0.203: D5.A 27.94,50.77 R9.1
N$5
  Top 0.203: D4.A 27.94,38.99 R6.1
N$6
  Top 0.203: D6.A 10.06,40.82 10.06,38.89 R5.1
N$7
  Top 0.203: D10.A 65.4,50.77 R15.1
N$8
  Top 0.203: D9.A 65.4,38.99 R14.1
N$9
  Top 0.203: D11.A 47.52,40.82 47.52,38.89 R13.1
N$10
  Top 0.203: D14.A 65.4,21.56 R21.1
N$11
  Top 0.203: D13.A 65.4,9.78 R20.1
N$12
  Top 0.203: D15.A 47.52,11.61 47.52,9.68 R19.1
N$13
  Top 0.203: D18.A 27.94,79.98 R27.1
N$14
  Top 0.203: D17.A 27.94,68.2 R26.1
N$15
  Top 0.203: D19.A 10.06,70.03 10.06,68.1 R25.1
N$16
  Top 0.203: D22.A 65.4,79.98 R33.1
N$17
  Top 0.203: D21.A 65.4,68.2 R32.1
N$18
  Top 0.203: D23.A 47.52,70.03 47.52,68.1 R31.1
PB1
  Top 0.203: U$2.29 24.89,45.69 26.03,45.69 26.75,44.98 29.46,44.98 29.87,45.39 29.87,50.67 31.09,51.89 D8.4 31.19,51.99 32.31,53.11 32.31,55.75 J8.2
PB2
  Top 0.203: U$2.28 24.89,44.88 26.01,44.88 26.42,44.48 30,44.48 30.61,45.09 30.61,45.34 30.28,45.67 30.28,49.25 33.53,52.5 33.53,54.43 34.85,55.75 J8.1
PB3
  Top 0.203: U$2.30 24.89,46.51 26.21,46.51 27.43,47.73 28.45,47.73 29.46,48.74 29.46,55.45 29.77,55.75 J8.3
PB4
  Top 0.203: U$1.28 24.89,15.67 26.01,15.67 26.42,15.27 30,15.27 30.61,15.88 30.61,16.13 30.28,16.46 30.28,20.04 33.53,23.29 33.53,25.22 34.85,26.54 J3.1
PB5
  Top 0.203: U$1.29 24.89,16.48 26.03,16.48 26.75,15.77 29.46,15.77 29.87,16.18 29.87,21.46 31.09,22.68 D3.4 31.19,22.78 32.31,23.9 32.31,26.54 J3.2
PB6
  Top 0.203: U$1.30 24.89,17.3 26.21,17.3 27.43,18.52 28.45,18.52 29.46,19.53 29.46,26.24 29.77,26.54 J3.3
PB9
  Top 0.203: U$3.29 62.36,45.69 63.5,45.69 64.21,44.98 66.93,44.98 67.34,45.39 67.34,50.67 68.55,51.89 D12.4 68.66,51.99 69.77,53.11 69.77,55.75 J12.2
PB10
  Top 0.203: U$3.28 62.36,44.88 63.47,44.88 63.88,44.48 67.46,44.48 68.07,45.09 68.07,45.34 67.74,45.67 67.74,49.25 70.99,52.5 70.99,54.43 72.31,55.75 J12.1
PB11
  Top 0.203: U$3.30 62.36,46.51 63.68,46.51 64.9,47.73 65.91,47.73 66.93,48.74 66.93,55.45 67.23,55.75 J12.3
PB13
  Top 0.203: U$4.29 62.36,16.48 63.5,16.48 64.21,15.77 66.93,15.77 67.34,16.18 67.34,21.46 68.55,22.68 D16.4 68.66,22.78 69.77,23.9 69.77,26.54 J16.2
PB14
  Top 0.203: U$4.28 62.36,15.67 63.47,15.67 63.88,15.27 67.46,15.27 68.07,15.88 68.07,16.13 67.74,16.46 67.74,20.04 70.99,23.29 70.99,25.22 72.31,26.54 J16.1
PB15
  Top 0.203: U$4.30 62.36,17.3 63.68,17.3 64.9,18.52 65.91,18.52 66.93,19.53 66.93,26.24 67.23,26.54 J16.3
PB17
  Top 0.203: U$5.29 24.89,74.9 26.03,74.9 26.75,74.19 29.46,74.19 29.87,74.6 29.87,79.88 31.09,81.1 D20.4 31.19,81.2 32.31,82.32 32.31,84.96 J20.2
PB18
  Top 0.203: U$5.28 24.89,74.09 26.01,74.09 26.42,73.69 30,73.69 30.61,74.3 30.61,74.55 30.28,74.88 30.28,78.46 33.53,81.71 33.53,83.64 34.85,84.96 J20.1
PB19
  Top 0.203: U$5.30 24.89,75.72 26.21,75.72 27.43,76.94 28.45,76.94 29.46,77.95 29.46,84.66 29.77,84.96 J20.3
PB21
  Top 0.203: U$6.29 62.36,74.9 63.5,74.9 64.21,74.19 66.93,74.19 67.34,74.6 67.34,79.88 68.55,81.1 D24.4 68.66,81.2 69.77,82.32 69.77,84.96 J24.2
PB22
  Top 0.203: U$6.28 62.36,74.09 63.47,74.09 63.88,73.69 67.46,73.69 68.07,74.3 68.07,74.55 67.74,74.88 67.74,78.46 70.99,81.71 70.99,83.64 72.31,84.96 J24.1
PB23
  Top 0.203: U$6.30 62.36,75.72 63.68,75.72 64.9,76.94 65.91,76.94 66.93,77.95 66.93,84.66 67.23,84.96 J24.3
PC1  (via drill 0.51)
  Top 0.203: v24.08,49.86 23.77,49.56 23.77,48.44 24.18,48.03 24.79,48.03 U$2.32
  Bottom 0.203: J8.5 24.69,55.75 24.69,55.04 24.49,54.84 24.49,54.53 24.08,54.13 24.08,53.47 23.24,52.63 23.24,50.7 v24.08,49.86
PC2
  Top 0.203: U$2.31 24.89,47.32 25.6,47.32 27.13,48.84 27.13,55.65 27.23,55.75 J8.4
PC3  (via drill 0.51)
  Top 0.203: v61.54,49.86 61.24,49.56 61.24,48.44 61.65,48.03 62.26,48.03 U$3.32
  Bottom 0.203: J12.5 62.15,55.75 62.15,55.04 61.95,54.84 61.95,54.53 61.54,54.13 61.54,53.47 60.71,52.63 60.71,50.7 v61.54,49.86
PC4
  Top 0.203: U$3.31 62.36,47.32 63.07,47.32 64.59,48.84 64.59,55.65 64.69,55.75 J12.4
PC5  (via drill 0.51)
  Top 0.203: v61.54,20.65 61.24,20.35 61.24,19.23 61.65,18.82 62.26,18.82 U$4.32
  Bottom 0.203: J16.5 62.15,26.54 62.15,25.83 61.95,25.63 61.95,25.32 61.54,24.92 61.54,24.26 60.71,23.42 60.71,21.49 v61.54,20.65
PC6
  Top 0.203: U$1.31 24.89,18.11 25.6,18.11 27.13,19.63 27.13,26.44 27.23,26.54 J3.4
PC7  (via drill 0.51)
  Top 0.203: v24.08,20.65 23.77,20.35 23.77,19.23 24.18,18.82 24.79,18.82 U$1.32
  Bottom 0.203: J3.5 24.69,26.54 24.69,25.83 24.49,25.63 24.49,25.32 24.08,24.92 24.08,24.26 23.24,23.42 23.24,21.49 v24.08,20.65
PC8
  Top 0.203: U$4.31 62.36,18.11 63.07,18.11 64.59,19.63 64.59,26.44 64.69,26.54 J16.4
PC9  (via drill 0.51)
  Top 0.203: v24.08,79.07 23.77,78.77 23.77,77.65 24.18,77.24 24.79,77.24 U$5.32
  Bottom 0.203: J20.5 24.69,84.96 24.69,84.25 24.49,84.05 24.49,83.74 24.08,83.34 24.08,82.68 23.24,81.84 23.24,79.91 v24.08,79.07
PC10
  Top 0.203: U$5.31 24.89,76.53 25.6,76.53 27.13,78.05 27.13,84.86 27.23,84.96 J20.4
PC11  (via drill 0.51)
  Top 0.203: v61.54,79.07 61.24,78.77 61.24,77.65 61.65,77.24 62.26,77.24 U$6.32
  Bottom 0.203: J24.5 62.15,84.96 62.15,84.25 61.95,84.05 61.95,83.74 61.54,83.34 61.54,82.68 60.71,81.84 60.71,79.91 v61.54,79.07
PC12
  Top 0.203: U$6.31 62.36,76.53 63.07,76.53 64.59,78.05 64.59,84.86 64.69,84.96 J24.4
PD0  (via drill 0.51)
  Top 0.203: v19.81,11.3 19.81,9.88 U$1.18
  Bottom 0.203: v19.81,11.3 19.81,9.88 15.76,5.83 15.65,5.94 14.38,5.94 13.13,4.68 13.13,3.24 12.47,2.57 12.47,2.54 11.07,1.14 4.37,1.14 2.84,2.67 2.84,2.87 J4.1
PD1  (via drill 0.51)
  Top 0.203: v17.58,11.4 18.69,11.4 19.41,12.12 20.22,12.12 20.62,11.71 20.62,9.88 U$1.19
  Bottom 0.203: v17.58,11.4 10.46,4.29 9.55,4.29 9.14,4.7 6.91,4.7 5.38,3.18 5.38,2.97 J4.2
PD2
  Top 0.203: J7.1 32.46,40.06 30.84,40.06 28.96,41.94 27.43,41.94 27.03,42.34 24.89,42.34 U$2.25
PD3
  Top 0.203: J7.2 31.39,43.66 27.43,43.66 27.03,43.26 24.89,43.26 U$2.26
PD4
  Top 0.203: J2.1 32.46,10.85 30.84,10.85 28.96,12.73 27.43,12.73 27.03,13.13 24.89,13.13 U$1.25
PD5
  Top 0.203: J7.3 33.53,44.07 24.89,44.07 U$2.27
PD6
  Top 0.203: J2.2 31.39,14.45 27.43,14.45 27.03,14.05 24.89,14.05 U$1.26
PD7
  Top 0.203: J2.3 33.53,14.86 24.89,14.86 U$1.27
PD8  (via drill 0.51)
  Top 0.203: v17.58,40.61 18.69,40.61 19.41,41.33 20.22,41.33 20.62,40.92 20.62,39.09 U$2.19
  Bottom 0.203: v17.58,40.61 10.46,33.5 9.55,33.5 9.14,33.91 6.91,33.91 5.38,32.39 5.38,32.18 J6.2
PD9  (via drill 0.51)
  Top 0.203: v19.81,40.51 19.81,39.09 U$2.18
  Bottom 0.203: v19.81,40.51 19.81,39.09 15.76,35.04 15.65,35.15 14.38,35.15 13.13,33.89 13.13,32.45 12.47,31.78 12.47,31.75 11.07,30.35 4.37,30.35 2.84,31.88 2.84,32.08 J6.1
PD10
  Top 0.203: J11.1 69.93,40.06 68.3,40.06 66.42,41.94 64.9,41.94 64.49,42.34 62.36,42.34 U$3.25
PD11
  Top 0.203: J11.2 68.86,43.66 64.9,43.66 64.49,43.26 62.36,43.26 U$3.26
PD12
  Top 0.203: J11.3 70.99,44.07 62.36,44.07 U$3.27
PD13  (via drill 0.51)
  Top 0.203: v55.04,40.61 56.16,40.61 56.87,41.33 57.68,41.33 58.09,40.92 58.09,39.09 U$3.19
  Bottom 0.203: v55.04,40.61 47.93,33.5 47.02,33.5 46.61,33.91 44.37,33.91 42.85,32.39 42.85,32.18 J10.2
PD14  (via drill 0.51)
  Top 0.203: v57.28,40.51 57.28,39.09 U$3.18
  Bottom 0.203: v57.28,40.51 57.28,39.09 53.23,35.04 53.12,35.15 51.85,35.15 50.6,33.89 50.6,32.45 49.94,31.78 49.94,31.75 48.54,30.35 41.83,30.35 40.31,31.88 40.31,32.08 J10.1
PD15
  Top 0.203: J15.1 69.93,10.85 68.3,10.85 66.42,12.73 64.9,12.73 64.49,13.13 62.36,13.13 U$4.25
PD16
  Top 0.203: J15.2 68.86,14.45 64.9,14.45 64.49,14.05 62.36,14.05 U$4.26
PD17
  Top 0.203: J15.3 70.99,14.86 62.36,14.86 U$4.27
PD18  (via drill 0.51)
  Top 0.203: v55.04,11.4 56.16,11.4 56.87,12.12 57.68,12.12 58.09,11.71 58.09,9.88 U$4.19
  Bottom 0.203: v55.04,11.4 47.93,4.29 47.02,4.29 46.61,4.7 44.37,4.7 42.85,3.18 42.85,2.97 J14.2
PD19  (via drill 0.51)
  Top 0.203: v57.28,11.3 57.28,9.88 U$4.18
  Bottom 0.203: v57.28,11.3 57.28,9.88 53.23,5.83 53.12,5.94 51.85,5.94 50.6,4.68 50.6,3.24 49.94,2.57 49.94,2.54 48.54,1.14 41.83,1.14 40.31,2.67 40.31,2.87 J14.1
PD20
  Top 0.203: J19.1 32.46,69.27 30.84,69.27 28.96,71.15 27.43,71.15 27.03,71.55 24.89,71.55 U$5.25
PD21
  Top 0.203: J19.2 31.39,72.87 27.43,72.87 27.03,72.47 24.89,72.47 U$5.26
PD22
  Top 0.203: J19.3 33.53,73.28 24.89,73.28 U$5.27
PD23  (via drill 0.51)
  Top 0.203: v17.58,69.82 18.69,69.82 19.41,70.54 20.22,70.54 20.62,70.13 20.62,68.3 U$5.19
  Bottom 0.203: v17.58,69.82 10.46,62.71 9.55,62.71 9.14,63.12 6.91,63.12 5.38,61.6 5.38,61.39 J18.2
PD24  (via drill 0.51)
  Top 0.203: v19.81,69.72 19.81,68.3 U$5.18
  Bottom 0.203: v19.81,69.72 19.81,68.3 15.76,64.25 15.65,64.36 14.38,64.36 13.13,63.1 13.13,61.66 12.47,60.99 12.47,60.96 11.07,59.56 4.37,59.56 2.84,61.09 2.84,61.29 J18.1
PD25
  Top 0.203: J23.1 69.93,69.27 68.3,69.27 66.42,71.15 64.9,71.15 64.49,71.55 62.36,71.55 U$6.25
PD26
  Top 0.203: J23.2 68.86,72.87 64.9,72.87 64.49,72.47 62.36,72.47 U$6.26
PD27
  Top 0.203: J23.3 70.99,73.28 62.36,73.28 U$6.27
PD28  (via drill 0.51)
  Top 0.203: v55.04,69.82 56.16,69.82 56.87,70.54 57.68,70.54 58.09,70.13 58.09,68.3 U$6.19
  Bottom 0.203: v55.04,69.82 47.93,62.71 47.02,62.71 46.61,63.12 44.37,63.12 42.85,61.6 42.85,61.39 J22.2
PD29  (via drill 0.51)
  Top 0.203: v57.28,69.72 57.28,68.3 U$6.18
  Bottom 0.203: v57.28,69.72 57.28,68.3 53.23,64.25 53.12,64.36 51.85,64.36 50.6,63.1 50.6,61.66 49.94,60.99 49.94,60.96 48.54,59.56 41.83,59.56 40.31,61.09 40.31,61.29 J22.1
PF0
  Top 0.203: U$1.41 17.37,21.46 17.37,22.17 14.73,24.82 11.28,24.82 9.55,26.54 J3.11
PF1
  Top 0.203: U$1.40 18.19,21.46 18.19,22.17 15.14,25.22 13.41,25.22 12.09,26.54 J3.10
PF2
  Top 0.203: U$2.36 21.54,50.67 21.54,55.14 22.15,55.75 J8.6
PF3
  Top 0.203: U$2.37 20.62,50.67 20.62,54.84 19.71,55.75 J8.7
PF4
  Top 0.203: U$1.39 19,21.46 19,22.17 14.63,26.54 J3.9
PF5
  Top 0.203: U$1.38 19.81,21.46 19.81,23.9 17.17,26.54 J3.8
PF6
  Top 0.203: U$1.37 20.62,21.46 20.62,25.63 19.71,26.54 J3.7
PF7
  Top 0.203: U$1.36 21.54,21.46 21.54,25.93 22.15,26.54 J3.6
PF8
  Top 0.203: U$2.38 19.81,50.67 19.81,53.11 17.17,55.75 J8.8
PF9
  Top 0.203: U$2.39 19,50.67 19,51.38 14.63,55.75 J8.9
PF10
  Top 0.203: U$2.40 18.19,50.67 18.19,51.38 15.14,54.43 13.41,54.43 12.09,55.75 J8.10
PF11
  Top 0.203: U$2.41 17.37,50.67 17.37,51.38 14.73,54.03 11.28,54.03 9.55,55.75 J8.11
PF12
  Top 0.203: U$3.36 59,50.67 59,55.14 59.61,55.75 J12.6
PF13
  Top 0.203: U$3.37 58.09,50.67 58.09,54.84 57.18,55.75 J12.7
PF14
  Top 0.203: U$3.38 57.28,50.67 57.28,53.11 54.64,55.75 J12.8
PF15
  Top 0.203: U$3.39 56.46,50.67 56.46,51.38 52.1,55.75 J12.9
PF16
  Top 0.203: U$3.40 55.65,50.67 55.65,51.38 52.6,54.43 50.88,54.43 49.56,55.75 J12.10
PF17
  Top 0.203: U$3.41 54.84,50.67 54.84,51.38 52.2,54.03 48.74,54.03 47.02,55.75 J12.11
PF18
  Top 0.203: U$4.36 59,21.46 59,25.93 59.61,26.54 J16.6
PF19
  Top 0.203: U$4.37 58.09,21.46 58.09,25.63 57.18,26.54 J16.7
PF20
  Top 0.203: U$4.38 57.28,21.46 57.28,23.9 54.64,26.54 J16.8
PF21
  Top 0.203: U$4.39 56.46,21.46 56.46,22.17 52.1,26.54 J16.9
PF22
  Top 0.203: U$4.40 55.65,21.46 55.65,22.17 52.6,25.22 50.88,25.22 49.56,26.54 J16.10
PF23
  Top 0.203: U$4.41 54.84,21.46 54.84,22.17 52.2,24.82 48.74,24.82 47.02,26.54 J16.11
PF24
  Top 0.203: U$5.36 21.54,79.88 21.54,84.35 22.15,84.96 J20.6
PF25
  Top 0.203: U$5.37 20.62,79.88 20.62,84.05 19.71,84.96 J20.7
PF26
  Top 0.203: U$5.38 19.81,79.88 19.81,82.32 17.17,84.96 J20.8
PF27
  Top 0.203: U$5.39 19,79.88 19,80.59 14.63,84.96 J20.9
PF28
  Top 0.203: U$5.40 18.19,79.88 18.19,80.59 15.14,83.64 13.41,83.64 12.09,84.96 J20.10
PF29
  Top 0.203: U$5.41 17.37,79.88 17.37,80.59 14.73,83.24 11.28,83.24 9.55,84.96 J20.11
PF30
  Top 0.203: U$6.36 59,79.88 59,84.35 59.61,84.96 J24.6
PF31
  Top 0.203: U$6.37 58.09,79.88 58.09,84.05 57.18,84.96 J24.7
PF32
  Top 0.203: U$6.38 57.28,79.88 57.28,82.32 54.64,84.96 J24.8
PF33
  Top 0.203: U$6.39 56.46,79.88 56.46,80.59 52.1,84.96 J24.9
PF34
  Top 0.203: U$6.40 55.65,79.88 55.65,80.59 52.6,83.64 50.88,83.64 49.56,84.96 J24.10
PF35
  Top 0.203: U$6.41 54.84,79.88 54.84,80.59 52.2,83.24 48.74,83.24 47.02,84.96 J24.11
RST
  Top 0.203: S1.1 S1.2 21.95,2.06 21.54,1.65 9.85,1.65 9.14,2.36 9.14,5.92 | U$1.13 15.85,9.78 15.85,9.17 14.93,8.26 12.29,8.26 10.57,6.53 10.16,6.53 R8.1 10.06,6.43 9.55,5.92 9.14,5.92 | 9.14,5.92 4.37,5.92 3.56,6.73 3.56,7.75 2.34,8.97 2.34,9.78 ICSP.5
RST1
  Top 0.203: S2.1 S2.2 21.95,31.27 21.54,30.86 9.85,30.86 9.14,31.57 9.14,35.13 | U$2.13 15.85,38.99 15.85,38.38 14.93,37.47 12.29,37.47 10.57,35.74 10.16,35.74 R10.1 10.06,35.64 9.55,35.13 9.14,35.13 | 9.14,35.13 4.37,35.13 3.56,35.94 3.56,36.96 2.34,38.18 2.34,38.99 ICSP1.5
RST2
  Top 0.203: S3.1 S3.2 59.41,31.27 59,30.86 47.32,30.86 46.61,31.57 46.61,35.13 | U$3.13 53.31,38.99 53.31,38.38 52.4,37.47 49.76,37.47 48.03,35.74 47.62,35.74 R16.1 47.52,35.64 47.02,35.13 46.61,35.13 | 46.61,35.13 41.83,35.13 41.02,35.94 41.02,36.96 39.8,38.18 39.8,38.99 ICSP2.5
RST3
  Top 0.203: S4.1 S4.2 59.41,2.06 59,1.65 47.32,1.65 46.61,2.36 46.61,5.92 | U$4.13 53.31,9.78 53.31,9.17 52.4,8.26 49.76,8.26 48.03,6.53 47.62,6.53 R22.1 47.52,6.43 47.02,5.92 46.61,5.92 | 46.61,5.92 41.83,5.92 41.02,6.73 41.02,7.75 39.8,8.97 39.8,9.78 ICSP3.5
RST4
  Top 0.203: S5.1 S5.2 21.95,60.48 21.54,60.07 9.85,60.07 9.14,60.78 9.14,64.34 | U$5.13 15.85,68.2 15.85,67.59 14.93,66.68 12.29,66.68 10.57,64.95 10.16,64.95 R28.1 10.06,64.85 9.55,64.34 9.14,64.34 | 9.14,64.34 4.37,64.34 3.56,65.15 3.56,66.17 2.34,67.39 2.34,68.2 ICSP4.5
RST5
  Top 0.203: S6.1 S6.2 59.41,60.48 59,60.07 47.32,60.07 46.61,60.78 46.61,64.34 | U$6.13 53.31,68.2 53.31,67.59 52.4,66.68 49.76,66.68 48.03,64.95 47.62,64.95 R34.1 47.52,64.85 47.02,64.34 46.61,64.34 | 46.61,64.34 41.83,64.34 41.02,65.15 41.02,66.17 39.8,67.39 39.8,68.2 ICSP5.5
RX  (via drill 0.51)
  Top 0.203: v18.39,12.32 18.59,12.52 20.42,12.52 21.44,11.51 21.44,9.88 U$1.20
  Bottom 0.203: v18.39,12.32 18.39,9.07 15.67,6.34 14.22,6.34 12.7,4.83 12.7,3.43 12.73,3.4 10.87,1.55 9.45,1.55 8.13,2.87 7.92,2.87 J4.3
RX1  (via drill 0.51)
  Top 0.203: v18.39,41.53 18.59,41.73 20.42,41.73 21.44,40.72 21.44,39.09 U$2.20
  Bottom 0.203: v18.39,41.53 18.39,38.28 15.67,35.55 14.22,35.55 12.7,34.04 12.7,32.64 12.73,32.61 10.87,30.76 9.45,30.76 8.13,32.08 7.92,32.08 J6.3
RX2  (via drill 0.51)
  Top 0.203: v55.85,41.53 56.06,41.73 57.89,41.73 58.9,40.72 58.9,39.09 U$3.20
  Bottom 0.203: v55.85,41.53 55.85,38.28 53.13,35.55 51.68,35.55 50.16,34.04 50.16,32.64 50.19,32.61 48.34,30.76 46.91,30.76 45.59,32.08 45.39,32.08 J10.3
RX3  (via drill 0.51)
  Top 0.203: v55.85,12.32 56.06,12.52 57.89,12.52 58.9,11.51 58.9,9.88 U$4.20
  Bottom 0.203: v55.85,12.32 55.85,9.07 53.13,6.34 51.68,6.34 50.16,4.83 50.16,3.43 50.19,3.4 48.34,1.55 46.91,1.55 45.59,2.87 45.39,2.87 J14.3
RX4  (via drill 0.51)
  Top 0.203: v18.39,70.74 18.59,70.94 20.42,70.94 21.44,69.93 21.44,68.3 U$5.20
  Bottom 0.203: v18.39,70.74 18.39,67.49 15.67,64.76 14.22,64.76 12.7,63.25 12.7,61.85 12.73,61.82 10.87,59.97 9.45,59.97 8.13,61.29 7.92,61.29 J18.3
RX5  (via drill 0.51)
  Top 0.203: v55.85,70.74 56.06,70.94 57.89,70.94 58.9,69.93 58.9,68.3 U$6.20
  Bottom 0.203: v55.85,70.74 55.85,67.49 53.13,64.76 51.68,64.76 50.16,63.25 50.16,61.85 50.19,61.82 48.34,59.97 46.91,59.97 45.59,61.29 45.39,61.29 J22.3
RX_LED  (via drill 0.51)
  Top 0.203: v11.79,11.61 11.79,9.68 R2.2 | v11.79,13.23 12.5,13.94 13.21,13.94 U$1.8
  Bottom 0.203: v11.79,13.23 v11.79,11.61
RX_LED1  (via drill 0.51)
  Top 0.203: v11.79,40.82 11.79,38.89 R5.2 | v11.79,42.44 12.5,43.15 13.21,43.15 U$2.8
  Bottom 0.203: v11.79,42.44 v11.79,40.82
RX_LED2  (via drill 0.51)
  Top 0.203: v49.25,40.82 49.25,38.89 R13.2 | v49.25,42.44 49.96,43.15 50.67,43.15 U$3.8
  Bottom 0.203: v49.25,42.44 v49.25,40.82
RX_LED3  (via drill 0.51)
  Top 0.203: v49.25,11.61 49.25,9.68 R19.2 | v49.25,13.23 49.96,13.94 50.67,13.94 U$4.8
  Bottom 0.203: v49.25,13.23 v49.25,11.61
RX_LED4  (via drill 0.51)
  Top 0.203: v11.79,70.03 11.79,68.1 R25.2 | v11.79,71.65 12.5,72.36 13.21,72.36 U$5.8
  Bottom 0.203: v11.79,71.65 v11.79,70.03
RX_LED5  (via drill 0.51)
  Top 0.203: v49.25,70.03 49.25,68.1 R31.2 | v49.25,71.65 49.96,72.36 50.67,72.36 U$6.8
  Bottom 0.203: v49.25,71.65 v49.25,70.03
SCK  (via drill 0.51)
  Top 0.203: v13.41,10.29 14.33,11.2 14.33,12.83 14.02,13.13 13.31,13.13 U$1.9
  Bottom 0.203: v13.41,10.29 12.9,10.8 9.25,10.8 8.53,11.51 6.2,11.51 4.88,10.19 4.88,9.78 ICSP.3
SCK1  (via drill 0.51)
  Top 0.203: v13.41,39.5 14.33,40.41 14.33,42.04 14.02,42.34 13.31,42.34 U$2.9
  Bottom 0.203: v13.41,39.5 12.9,40.01 9.25,40.01 8.53,40.72 6.2,40.72 4.88,39.4 4.88,38.99 ICSP1.3
SCK2  (via drill 0.51)
  Top 0.203: v50.88,39.5 51.79,40.41 51.79,42.04 51.49,42.34 50.77,42.34 U$3.9
  Bottom 0.203: v50.88,39.5 50.37,40.01 46.71,40.01 46,40.72 43.66,40.72 42.34,39.4 42.34,38.99 ICSP2.3
SCK3  (via drill 0.51)
  Top 0.203: v50.88,10.29 51.79,11.2 51.79,12.83 51.49,13.13 50.77,13.13 U$4.9
  Bottom 0.203: v50.88,10.29 50.37,10.8 46.71,10.8 46,11.51 43.66,11.51 42.34,10.19 42.34,9.78 ICSP3.3
SCK4  (via drill 0.51)
  Top 0.203: v13.41,68.71 14.33,69.62 14.33,71.25 14.02,71.55 13.31,71.55 U$5.9
  Bottom 0.203: v13.41,68.71 12.9,69.22 9.25,69.22 8.53,69.93 6.2,69.93 4.88,68.61 4.88,68.2 ICSP4.3
SCK5  (via drill 0.51)
  Top 0.203: v50.88,68.71 51.79,69.62 51.79,71.25 51.49,71.55 50.77,71.55 U$6.9
  Bottom 0.203: v50.88,68.71 50.37,69.22 46.71,69.22 46,69.93 43.66,69.93 42.34,68.61 42.34,68.2 ICSP5.3
TX
  Top 0.203: J4.4 10.97,2.36 21.64,2.36 22.45,3.18 22.45,8.15 22.25,8.36 22.25,9.78 U$1.21
TX1
  Top 0.203: J6.4 10.97,31.57 21.64,31.57 22.45,32.39 22.45,37.36 22.25,37.57 22.25,38.99 U$2.21
TX2
  Top 0.203: J10.4 48.44,31.57 59.11,31.57 59.92,32.39 59.92,37.36 59.72,37.57 59.72,38.99 U$3.21
TX3
  Top 0.203: J14.4 48.44,2.36 59.11,2.36 59.92,3.18 59.92,8.15 59.72,8.36 59.72,9.78 U$4.21
TX4
  Top 0.203: J18.4 10.97,60.78 21.64,60.78 22.45,61.6 22.45,66.57 22.25,66.78 22.25,68.2 U$5.21
TX5
  Top 0.203: J22.4 48.44,60.78 59.11,60.78 59.92,61.6 59.92,66.57 59.72,66.78 59.72,68.2 U$6.21
TX_LED
  Top 0.203: R3.2 23.06,9.78 U$1.22
TX_LED1
  Top 0.203: R6.2 23.06,38.99 U$2.22
TX_LED2
  Top 0.203: R14.2 60.53,38.99 U$3.22
TX_LED3
  Top 0.203: R20.2 60.53,9.78 U$4.22
TX_LED4
  Top 0.203: R26.2 23.06,68.2 U$5.22
TX_LED5
  Top 0.203: R32.2 60.53,68.2 U$6.22
UCAP
  Top 0.305: U$1.6 11.56,15.62 10.67,14.73 C1.1
UCAP1
  Top 0.305: U$2.6 11.56,44.83 10.67,43.94 C4.1
UCAP2
  Top 0.305: U$3.6 49.02,44.83 48.13,43.94 C9.1
UCAP3
  Top 0.305: U$4.6 49.02,15.62 48.13,14.73 C13.1
UCAP4
  Top 0.305: U$5.6 11.56,74.04 10.67,73.15 C17.1
UCAP5
  Top 0.305: U$6.6 49.02,74.04 48.13,73.15 C21.1
USBD1_N
  Top 0.203: U$1.3 10.01,18.02 R4.2
USBD1_N1
  Top 0.203: U$2.3 10.01,47.23 R12.2
USBD1_N2
  Top 0.203: U$3.3 47.47,47.23 R18.2
USBD1_N3
  Top 0.203: U$4.3 47.47,18.02 R24.2
USBD1_N4
  Top 0.203: U$5.3 10.01,76.44 R30.2
USBD1_N5
  Top 0.203: U$6.3 47.47,76.44 R36.2
USBD1_P
  Top 0.203: U$1.4 10.07,17.22 R1.2
USBD1_P1
  Top 0.203: U$2.4 10.07,46.43 R11.2
USBD1_P2
  Top 0.203: U$3.4 47.53,46.43 R17.2
USBD1_P3
  Top 0.203: U$4.4 47.53,17.22 R23.2
USBD1_P4
  Top 0.203: U$5.4 10.07,75.64 R29.2
USBD1_P5
  Top 0.203: U$6.4 47.53,75.64 R35.2
USBD_N
  Top 0.203: R4.1 7.16,17.91 J1.D-
USBD_N1
  Top 0.203: R12.1 7.16,47.12 J5.D-
USBD_N2
  Top 0.203: R18.1 44.62,47.12 J9.D-
USBD_N3
  Top 0.203: R24.1 44.62,17.91 J13.D-
USBD_N4
  Top 0.203: R30.1 7.16,76.33 J17.D-
USBD_N5
  Top 0.203: R36.1 44.62,76.33 J21.D-
USBD_P
  Top 0.203: R1.1 7.16,17.26 J1.D+
USBD_P1
  Top 0.203: R11.1 7.16,46.47 J5.D+
USBD_P2
  Top 0.203: R17.1 44.63,46.47 J9.D+
USBD_P3
  Top 0.203: R23.1 44.63,17.26 J13.D+
USBD_P4
  Top 0.203: R29.1 7.16,75.68 J17.D+
USBD_P5
  Top 0.203: R35.1 44.63,75.68 J21.D+
XTAL_N
  Top 0.203: U$1.16 18.25,8.26 C6.2 17.49,4.91 Y1.2
XTAL_N1
  Top 0.203: U$2.16 18.25,37.47 C8.2 17.49,34.12 Y2.2
XTAL_N2
  Top 0.203: U$3.16 55.71,37.47 C12.2 54.95,34.12 Y3.2
XTAL_N3
  Top 0.203: U$4.16 55.71,8.26 C16.2 54.95,4.91 Y4.2
XTAL_N4
  Top 0.203: U$5.16 18.25,66.68 C20.2 17.49,63.33 Y5.2
XTAL_N5
  Top 0.203: U$6.16 55.71,66.68 C24.2 54.95,63.33 Y6.2
XTAL_P
  Top 0.203: U$1.17 19.05,8.29 C3.2 19.85,4.91 Y1.1
XTAL_P1
  Top 0.203: U$2.17 19.05,37.5 C7.2 19.85,34.12 Y2.1
XTAL_P2
  Top 0.203: U$3.17 56.51,37.5 C11.2 57.32,34.12 Y3.1
XTAL_P3
  Top 0.203: U$4.17 56.51,8.29 C15.2 57.32,4.91 Y4.1
XTAL_P4
  Top 0.203: U$5.17 19.05,66.71 C19.2 19.85,63.33 Y5.1
XTAL_P5
  Top 0.203: U$6.17 56.51,66.71 C23.2 57.32,63.33 Y6.1

## Text on the board
tPlace: 5V | GND | AREF | PF0 | PF1 | PF4 | PF5 | PF6 | PF7 | PC7 | PC6 | PB6 | PB5 | PB4 | 5V | GND | AREF | PF0 | PF1 | PF4 | PF5 | PF6 | PF7 | PC7 | PC6 | PB6 | PB5 | PB4 | PD7 | PD7 | RST | SCK | MISO | PD6 | RST | SCK | MISO | PD6 | PD4 | PD4 | GND | MOSI | 5V | GND | MOSI | 5V | SCL | SDA | RX | TX | SCL | SDA | RX | TX | 5V | PF0 | PF1 | PF4 | PF5 | PF6 | PF7 | PC7 | PC6 | PB6 | PB5 | PB4 | 5V | PF0 | PF1 | PF4 | PF5 | PF6 | PF7 | PC7 | PC6 | PB6 | PB5 | PB4 | GND | AREF | GND | AREF | PD7 | PD7 | RST | SCK | MISO | PD6 | RST | SCK | MISO | PD6 | PD4 | PD4 | GND | SCL | MOSI | SDA | 5V | RX | TX | GND | SCL | MOSI | SDA | 5V | RX | TX | 5V | PF0 | PF1 | PF4 | PF5 | PF6 | PF7 | PC7 | PC6 | PB6 | PB5 | PB4 | 5V | PF0 | PF1 | PF4 | PF5 | PF6 | PF7 | PC7 | PC6 | PB6 | PB5 | PB4 | GND | AREF | GND | AREF | PD7 | PD7 | PD6 | PD6 | RST | SCK | MISO | RST | SCK | MISO | PD4 | PD4 | GND | MOSI | 5V | GND | MOSI | 5V | SCL | SDA | RX | TX | SCL | SDA | RX | TX
_tNames: J20 | J24 | C18 | C22 | R30 | R36 | D18 | D22 | R29 | R35 | C17 | C21 | J17 | D19 | D17 | J21 | D23 | D21 | R26 | R32 | R25 | R31 | ICSP4 | ICSP5 | C20 | C19 | J19 | C24 | C23 | J23 | R28 | R34 | S5 | S6 | J18 | J22 | Y5 | Y6 | J8 | J12 | C5 | C10 | R12 | R18 | D5 | D10 | C4 | R11 | C9 | R17 | J5 | D6 | D4 | J9 | D11 | D9 | R6 | R14 | R5 | R13 | ICSP1 | ICSP2 | C7 | J7 | C11 | J11 | R10 | C8 | R16 | C12 | S2 | S3 | J6 | J10 | Y2 | Y3 | J3 | J16 | C2 | C14 | R4 | D7 | R24 | D14 | C1 | R1 | C13 | R23 | J1 | D2 | D1 | J13 | D15 | D13 | R2 | R3 | R19 | R20 | ICSP | C3 | ICSP3 | C15 | C6 | J2 | C16 | J15 | R8 | R22 | S1 | S4 | J4 | J14 | Y1 | Y4
_tFinish: C17 | C21 | C4 | C9 | C1 | C13